# Altium PCB USB-NORA-W1.PcbDoc (part 1 of 3)
Units mm, origin at the board's own origin, x right, y up, seen from the top; angles counter-clockwise.
Board outline 61.5 x 18 mm, 4 copper layers (Top Layer, Layer 2, Layer 3, Bottom Layer), stack 2.472 mm thick; 80 components, 75 nets, 307 pads, 219 vias.
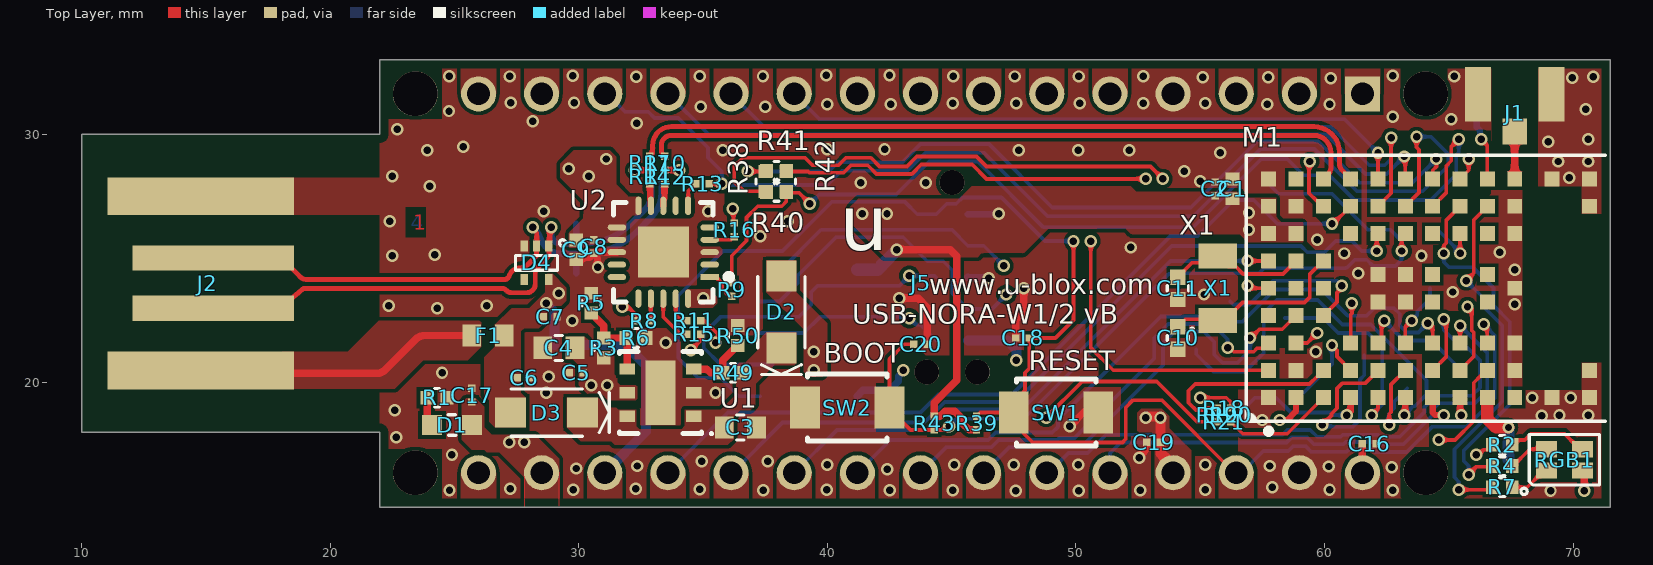
[diagram p0: Top Layer view]
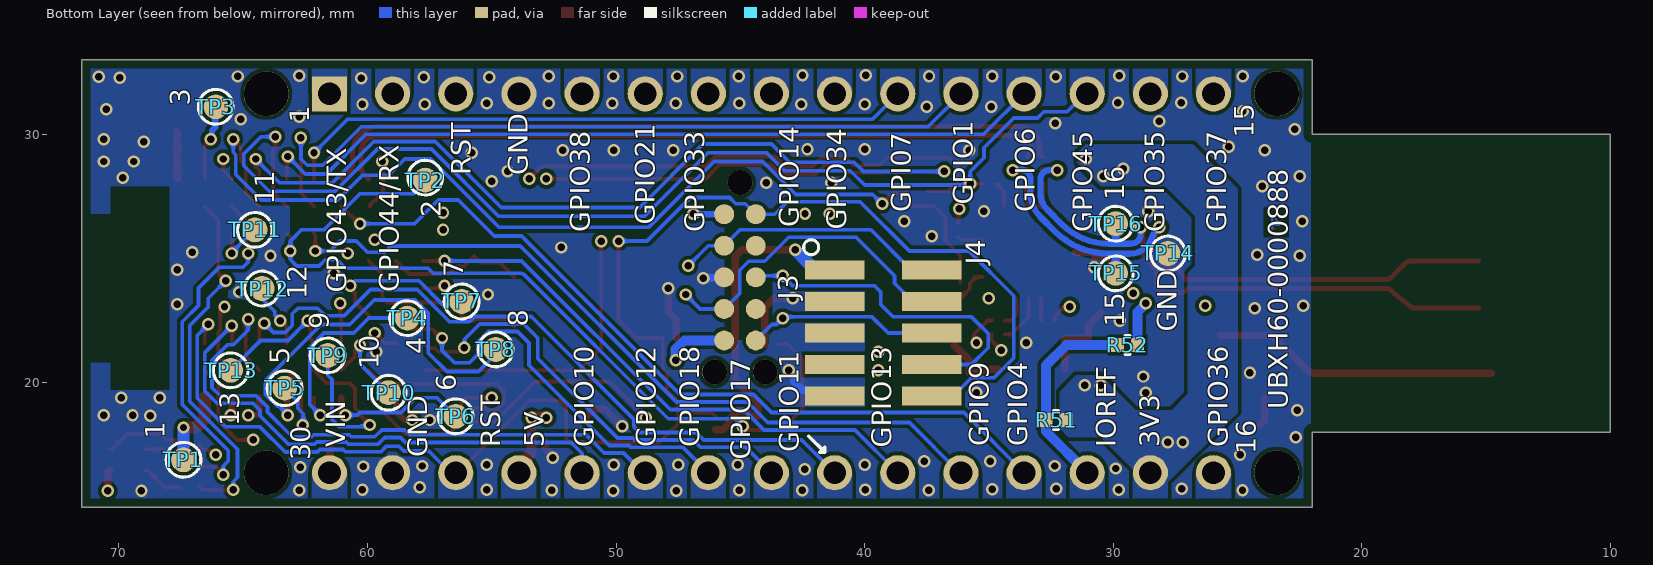
[diagram p1: Bottom Layer view, seen from below]
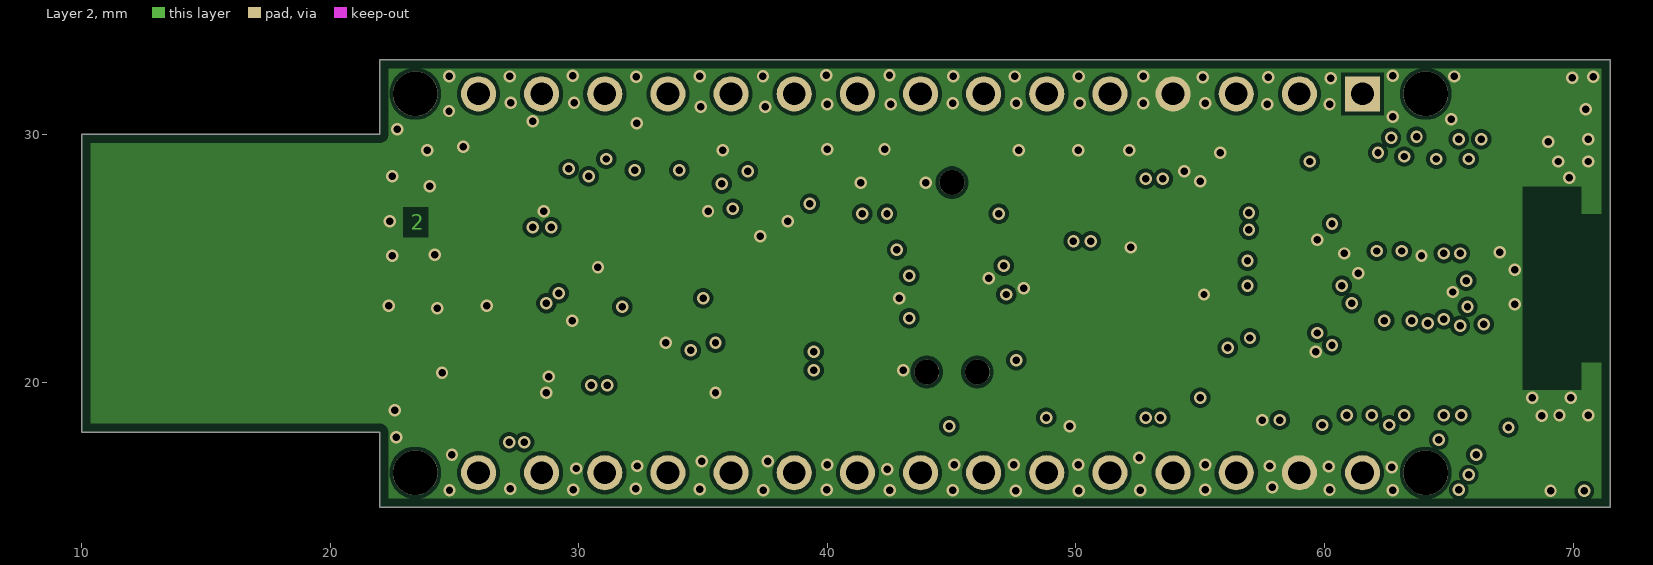
[diagram p2: Layer 2]
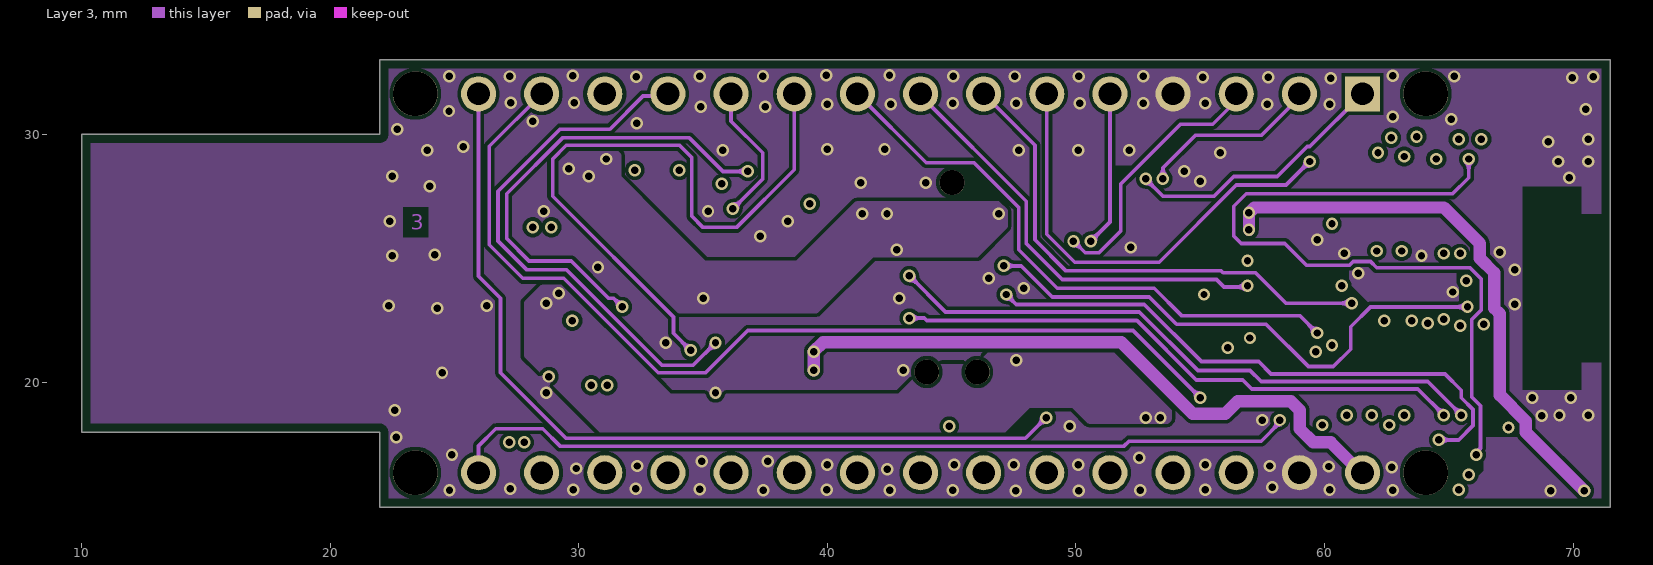
[diagram p3: Layer 3]

## Layer stack, top to bottom
Top Solder: solder mask 0.0102, Solder Resist, Dk 3.5
Top Layer: signal copper 0.035
Dielectric 2: prepreg 0.18, Prepreg 1080, Dk 3.77
Layer 2: signal copper 0.018
Dielectric10: core 2.0057, Core-039, Dk 4.8
Layer 3: signal copper 0.018
Dielectric 7: prepreg 0.18, Prepreg 1080, Dk 3.77
Bottom Layer: signal copper 0.035
Bottom Solder: solder mask 0.0102, Solder Resist, Dk 3.5

## Board outline
22,17.9 22,18 10,18 10,30 22,30 22,33 71.5,33 71.5,15 22,15

## Design rules (kind name [scope] priority, off if disabled: settings)
AssemblyTestPointUsage [All] p1 off:
AssemblyTestpoint [All] p1 off: testpointundercomponent=TRUE minsize=1.016 maxsize=2.54 preferedsize=1.524 minholesize=0 maxholesize=1.016 preferedholesize=0.813 testpointgrid=0.025 usegrid=TRUE gridtolerance=0 allowsidetop=TRUE allowsidebottom=TRUE
BoardOutlineClearance [All] p1: gap=0.356 ignorepadtopadclearanceinfootprint=FALSE
Clearance Clearance_1 [OnLayer('Top Layer')] p1: gap=0.15 ignorepadtopadclearanceinfootprint=TRUE except(0: Arc-Hole Track-Hole SMDPad-Hole THPad-Hole Via-Hole Fill-Hole Poly-Hole Region-Hole Text-Hole)
Clearance [All] p2: gap=0.15 ignorepadtopadclearanceinfootprint=FALSE except(0: Arc-Hole Track-Hole SMDPad-Hole THPad-Hole Via-Hole Fill-Hole Poly-Hole Region-Hole Text-Hole)
Clearance NoPlatedPAd [InPadClass('NPTH_Pads')] p3: gap=0.15 ignorepadtopadclearanceinfootprint=TRUE except(0.25: Fill-Hole Poly-Hole Region-Hole)
Clearance DIFF_100 [InNetClass('DIFF100')] p4: gap=0.25 ignorepadtopadclearanceinfootprint=TRUE except(0: Arc-Hole Track-Hole SMDPad-Hole THPad-Hole Via-Hole Fill-Hole Poly-Hole Region-Hole Text-Hole)
DiffPairsRouting [InDifferentialPairClass('DIFF100')] p1 off: maxlimit=1 minlimit=0.05 mostfreqgap=0.15 toplayer_mingap=0.15 toplayer_minwidth=0.3 toplayer_maxwidth=1 toplayer_prefwidth=0.3 bottomlayer_mingap=0.15 bottomlayer_minwidth=0.3 bottomlayer_maxwidth=1 bottomlayer_prefwidth=0.3 impedanceprofiledriven=TRUE impedanceprofileid={4EB0315E-D057-4056-870E-F8970DFE5718} impedanceprofilevalue=100.000000 maxuncoupledlength=12.7
FabricationTestPointUsage [All] p1 off: valid=0 allowmultiple=FALSE
FabricationTestpoint [All] p1 off: side=3 testpointundercomponent=TRUE minsize=1.016 maxsize=2.54 preferedsize=1.524 minholesize=0 maxholesize=1.016 preferedholesize=0.813 testpointgrid=0.025 allowsidetop=TRUE allowsidebottom=TRUE usegrid=TRUE gridtolerance=0
HoleSize [All] p1: absolutevalues=TRUE maxlimit=2.54 minlimit=0.2 maxpercent=80.000 minpercent=20.000
HoleToHoleClearance [All] p1: gap=0.25 allowstackedmicrovias=TRUE
MatchedLengths DiffPair_DIFF100MatchedLengths [InNetClass('DIFF100')] p1: tolerance=0.1 checknetsindiffpair=TRUE checkdiffpairvsdiffpair=FALSE checkxsignals=FALSE checkothers=FALSE usedelayunits=TRUE delaytolerance=10.000000
MinimumSolderMaskSliver MinimumSolderMaskSliver_1 [InComponent('U4')] p1: minsoldermaskwidth=0.05
MinimumSolderMaskSliver [All] p2: minsoldermaskwidth=0.1
PlaneClearance Shape_via [InNet('3V3') And GND] p2: clearance=0.25
PolygonConnect GND_ [InNet('GND') and IsVia and IsPad] p1 off: thpad.connectstyle=Relief thpad.reliefconductorwidth=0.254 thpad.reliefentries=4 thpad.polygonreliefangle="90 Angle" thpad.airgapwidth=0.254 smdpad.connectstyle=Direct smdpad.reliefconductorwidth=0.254 smdpad.reliefentries=4 smdpad.polygonreliefangle="90 Angle" smdpad.airgapwidth=0.254 via.connectstyle=Direct via.reliefconductorwidth=0.254 via.reliefentries=4 via.polygonreliefangle="90 Angle" via.airgapwidth=0.254
PolygonConnect PolygonConnect_1 [All] p2: connectstyle=Direct reliefconductorwidth=0.254 reliefentries=4 polygonreliefangle="90 Angle" airgapwidth=0.254
RoutingVias [All] p1: holewidth=0.35 width=0.7 viastyle="Through Hole" minholewidth=0.35 minwidth=0.6 maxholewidth=0.35 maxwidth=0.6 useviatemplates=TRUE viatemplateguid#1={9B9B2C8B-3407-41E5-9278-FA540D01F2C8} viatemplateguid#2={13CDBC89-8302-4A6B-AFA1-809CA17073A7} viatemplateguid#3={858E1B08-E57D-4438-9A77-3527DEC644EC} viatemplatename#1=v350h250 viatemplatename#2=v500h250 viatemplatename#3=v550h0300
SilkToSilkClearance [All] p1: silktosilkclearance=0.1
SilkToSolderMaskClearance [IsText] p1: minsilkscreentomaskgap=0.075 clearancetoexposedcopper=TRUE
SolderMaskExpansion TentedVias [isvia] p1: expansion=0.05 istentingtop=TRUE
SolderMaskExpansion [All] p2: expansion=0.05 istentingtop=FALSE
UnRoutedNet [All] p1: checkbadconnections=TRUE
UnpouredPolygon [All] p1 off:
ViasUnderSMD [All] p1: allowed=TRUE
Width Width_1 [All] p1: maxlimit=1.5 minlimit=0.15 preferedwidth=0.254 minimp=50.000000 maximp=50.000000 favimp=50.000000
Width [All] p2: maxlimit=1.5 minlimit=0.1 preferedwidth=0.15 minimp=50.000000 maximp=50.000000 favimp=50.000000
Width 50_ohm_width [InNetClass('Signals')] p3: maxlimit=1.5 minlimit=0.15 preferedwidth=0.15
18 further rules are at their usual default settings.

## Classes and differential pairs
component class U_USB-NORA-W1_SCHEM_02: C1 C2 C3 C4 C5 C6 C7 C8 C9 C10 C11 D1 D2 D3 D4 F1 J1 J2 M1 R1 R2 R3 R4 R5 R6 R7 R8 R9 R10 R11 R12 R13 R14 R15 R16 R17 R18 R19 R20 R21 R49 R50 RGB1 TP1 TP2 TP3 TP4 TP5 TP6 TP7 TP8 TP9 TP10 TP11 TP12 TP13 TP14 TP15 TP16 U1 U2 X1
component class U_USB-NORA-W1_SCHEM_03: C16 C17 C18 C19 C20 J3 J4 J5 R38 R39 R40 R41 R42 R43 R51 R52 SW1 SW2
pad class NPTH_Pads: J2-0
net class DIFF100: USB_I_N USB_I_P USB_IOD_N USB_IOD_P USB_N USB_P
differential pair USB_IOD: +USB_IOD_P -USB_IOD_N
differential pair USB_I: +USB_I_P -USB_I_N
differential pair USB: +USB_P -USB_N

## Components (designator, comment, footprint, x,y, rotation, side; value= is the part's Value field where it differs from the comment)
C1 "UBXH01-00002434U7" "Cap 0402 HD" 56.3,27.8 r90 top value=4U7
C2 "UBXH01-0000417100N" "Cap 0201 HD"#1 55.6,27.8 r90 top value=100N
C3 "UBXH01-000004010U" "Cap 0603 HD" 36.5,18.2 r0 top value=10U
C4 "UBXH01-000004010U" "Cap 0603 HD" 29.2,21.4 r180 top value=10U
C5 "UBXH01-0000245100N" "Cap 0201 HD"#1 29.9,20.4 r180 top value=100N
C6 "UBXH01-0000245100N" "Cap 0201 HD"#1 27.8,20.2 r0 top value=100N
C7 "UBXH01-0000245100N" "Cap 0201 HD"#1 28.85,22.65 r0 top value=100N
C8 "UBXH01-0000417100N" "Cap 0201 HD"#1 30.6,25.475 r270 top value=100N
C9 "UBXH01-00002434U7" "Cap 0402 HD" 29.9,25.35 r270 top value=4U7
C10 "UBXH01-000401718P" "Cap 0402" 54.1,21.8 r270 top value=18P
C11 "UBXH01-000401718P" "Cap 0402" 54.1,23.8 r270 top value=18P
C16 "UBXH01-0000417100N" "Cap 0201 HD"#2 61.8,17.55 r0 top value=100N
C17 "UBXH01-0000417100N" "Cap 0201 HD"#1 25.7,19.5 r90 top value=100N
C18 "UBXH01-0000417100N" "Cap 0201 HD"#2 47.85,21.8 r180 top value=100N
C19 "UBXH01-0000417100N" "Cap 0201 HD"#2 53.125,17.6 r180 top value=100N
C20 "UBXH01-0000417100N" "Cap 0201 HD"#2 43.75,21.55 r0 top value=100N
D1 "UBXH11-0000018" LED-0603 24.9,18.3 r0 top value=GREEN
D2 "110-00005" SOD-123F_U#1 38.15,22.85 r90 top
D3 "110-00005" SOD-123F_U#2 28.7,18.8 r180 top
D4 "110-00018" SOT-553 28.3,24.825 r270 top
F1 "UBXH08-0000001" "IND 0603 HD" 26.35,21.9 r180 top value=600OHM
J1 "UBXH04-0001026" U.FL_3Pin 67.65,31.6 r0 top value=331-0472-2
J2 "CON-4PCB" USB-A-PCB 14.995,23.884 r0 top
J3 "TC2050-IDC-NLDNP" TC2050-IDC-NL 45.65,26.78 r270 bottom locked
J4 "130-00099" HDR.050P-10Pin-2x5-SMT_Key 39.25,22 r270 bottom locked
J5 "UNK_Arduino" UNK_Arduino 42.795,24 r270 top locked
M1 "NORA-MODULE_ALT" NORA_LGA82R_1430X1040X180_ANT 63.25,23.8 r0 top locked value=NORA
R1 "UBXH18-0008046750R" "RES 0402 HD"#1 24.3,19.4 r0 top value=750R
R2 "UBXH18-0000216360R" "RES 0402 HD"#2 67.15,17.5 r180 top value=360R
R3 "UBXH18-00030020R" "RES 0402 HD"#3 31,21.4 r90 top value=0R
R4 "UBXH18-0000216360R" "RES 0402 HD"#2 67.15,16.65 r180 top value=360R
R5 "UBXH18-000807310K" "RES 0402 HD"#4 30.5,23.2 r270 top value=10K
R6 "UBXH18-000807310K" "RES 0402 HD"#3 32.3,21.8 r180 top value=10K
R7 "UBXH18-0008046750R" "RES 0402 HD"#2 67.15,15.8 r180 top value=750R
R8 "UBXH18-00000071K0" "RES 0201 HD"#1 32.625,22.5 r180 top value=1K0
R9 "UBXH18-00080491K0" "RES 0201 HD"#1 36.15,23.75 r90 top value=1K0
R10 "UBXH18-000047027R" "RES 0201 HD"#1 33.45,28.828 r90 top value=27R
R11 "UBXH18-00080491K0" "RES 0201 HD"#1 34.625,22.5 r0 top value=1K0
R12 "UBXH18-000047027R" "RES 0201 HD"#1 33.45,28.278 r270 top value=27R
R13 "UBXH18-00000071K0" "RES 0201 HD"#1 34.975,28.003 r0 top value=1K0
R14 "UBXH18-000047027R" "RES 0201 HD"#1 32.85,28.278 r270 top value=27R
R15 "UBXH18-00000071K0" "RES 0201 HD"#1 34.625,21.95 r0 top value=1K0
R16 "UBXH18-00000071K0" "RES 0201 HD"#1 36.25,26.15 r90 top value=1K0
R17 "UBXH18-000047027R" "RES 0201 HD"#1 32.85,28.828 r270 top value=27R
R18 "UBXH18-00030020R" "RES 0201 HD"#1 55.95,18.983 r0 top value=0R
R19 "UBXH18-00030020R" "RES 0201 HD"#1 55.675,18.708 r90 top value=0R
R20 "UBXH18-00030020R" "RES 0201 HD"#1 56.225,18.708 r90 top value=0R
R21 "UBXH18-00030020R" "RES 0201 HD"#1 55.95,18.433 r180 top value=0R
R38 "UBXH18-00030020R" "RES 0402 HD"#2 37.5,28.1 r90 top value=0R
R39 "UBXH18-000109710K" "RES 0201 HD"#2 46,18.375 r270 top value=10K
R40 "UBXH18-00030020R" "RES 0402 HD"#2 37.95,27.675 r180 top value=0R
R41 "UBXH18-00030020R" "RES 0402 HD"#2 37.95,28.525 r180 top value=0R
R42 "UBXH18-00030020R" "RES 0402 HD"#2 38.35,28.1 r270 top value=0R
R43 "UBXH18-000807310K" "RES 0201 HD"#2 44.3,18.375 r90 top value=10K
R49 "UBXH18-00030020R" "RES 0402 HD"#3 36.2,20.4 r180 top value=0R
R50 "UBXH18-00030020R" "RES 0402 HD"#3 36.4,21.9 r270 top value=0R
R51 "UBXH18-00030020R" "RES 0402 HD"#2 32.3,18.5 r0 bottom value=0R
R52 "UBXH18-00030020R" "RES 0402 HD"#2 29.43,21.52 r0 bottom value=0R
RGB1 "115-00026" LED_1616 69.65,16.9 r90 top
SW1 "B3U-1000P" FP-B3U-1000P-MFG 49.2,18.8 r0 top locked
SW2 "B3U-1000P" FP-B3U-1000P-MFG 40.8,19 r180 top locked
TP1 "TP" TP10R#1 67.4,16.9 r0 bottom locked
TP2 "TP" TP10R#2 57.675,28.25 r90 bottom locked
TP3 "TP" TP10R#1 66.1,31.1 r90 bottom locked
TP4 "TP" TP10R#1 58.4,22.6 r90 bottom locked
TP5 "TP" TP10R#1 63.33,19.78 r90 bottom locked
TP6 "TP" TP10R#1 56.45,18.65 r90 bottom locked
TP7 "TP" TP10R#1 56.21,23.27 r90 bottom locked
TP8 "TP" TP10R#1 54.84,21.34 r90 bottom locked
TP9 "TP" TP10R#1 61.6,21.1 r90 bottom locked
TP10 "TP" TP10R#1 59.15,19.6 r90 bottom locked
TP11 "TP" TP10R#1 64.525,26.15 r90 bottom locked
TP12 "TP" TP10R#1 64.24,23.79 r90 bottom locked
TP13 "TP" TP10R#1 65.5,20.5 r90 bottom locked
TP14 "TP" TP10R#1 27.8,25.2 r90 bottom locked
TP15 "TP" TP10R#1 29.9,24.4 r90 bottom locked
TP16 "TP" TP10R#1 29.9,26.4 r90 bottom locked
U1 "NCP692MN33T2G" DFN-PSON.1P3X3-7pin_HS-7N 33.29,19.6 r180 top value=3.3V
U2 "FT231XQ-R" QFN_5x5_FT231XQ 33.4,25.25 r180 top
X1 "100-00005" XTAL_3215 55.7,23.8 r90 top

## Footprints (in the part's own frame and the unit in brackets; to place one, negate y for a bottom-side part, rotate by r counter-clockwise, add the part's x,y. Pads: shape width x height; smd on the part's side, far side on the other; paste and mask are expansions set on the pad)
"Cap 0201 HD"#1 [mm] "Chip Capacitor, 2-Leads, Body 0.60x0.30mm, IPC High Density"
  rect 0.3x0.3 smd mask+0: 1(-0.275,0) 2(0.275,0)
  body extent -0.32,-0.17 0.32,0.17, height 0.33
"Cap 0201 HD"#2 [mm] "Chip Capacitor, 2-Leads, Body 0.60x0.30mm, IPC High Density"
  rect 0.3x0.3 smd: 1(-0.275,0)
  rect 0.3x0.3 smd mask+0: 2(0.275,0)
  body extent -0.32,-0.17 0.32,0.17, height 0.33
"Cap 0402" [mm] "Chip Capacitor, 2-Leads, Body 1.00x0.50mm, IPC Medium Density"
  rect 0.62x0.62 smd: 1(-0.45,0)
  rect 0.62x0.62 smd mask+0: 2(0.45,0)
  silkscreen extent -0.1,-0.43 0.1,0.43, body extent -0.55,-0.3 0.55,0.3, height 0.6
"Cap 0402 HD" [mm] "Chip Capacitor, 2-Leads, Body 1.00x0.50mm, IPC High Density"
  rect 0.52x0.55 smd mask+0: 1(-0.4,0) 2(0.4,0)
  body extent -0.55,-0.3 0.55,0.3, height 0.6
"Cap 0603 HD" [mm] "Chip Cap 0603, 1.75mm x 9.5mm IPC High Density"
  rect 0.75x0.9 smd mask+0: 1(-0.65,0) 2(0.65,0)
  silkscreen extent -0.15,-0.5 0.15,0.5, body extent -0.87,-0.48 0.87,0.47, height 0.95
DFN-PSON.1P3X3-7pin_HS-7N [mm] "PSON, 6-Leads, Body 3,00x3,00mm, Pitch 0,95mm, Thermal Pad 2,60x1,22mm, IPC Medium Density"
  rect 0.63x0.45 smd mask+0: 1(-1.34,0.95) 2(-1.34,0) 5(1.34,0) 6(1.34,0.95)
  rect 0.63x0.45 smd mask+0.05: 3(-1.34,-0.95) 4(1.34,-0.95)
  rect 1.22x2.6 smd mask+0: 7(0,0)
  silkscreen extent -2.1,-1.65 1.65,1.7, body extent -1.5,-1.5 1.5,1.5, height 1
FP-B3U-1000P-MFG [mm]
  rect 1.2x1.7 smd paste+0: 1(-1.7,0)
  rect 1.2x1.7 smd paste+0 mask+0: 2(1.7,0)
  silkscreen extent -1.6,-1.35 1.6,1.35, body extent -2.2,-1.45 2.2,1.45, height 0.25
HDR.050P-10Pin-2x5-SMT_Key [mm] "Header, 0.05\" Pitch, 10 Pin 2 x 5, Keyed, SMT, 6.35mm x 5.84mm"
  rect 0.76x2.4 smd: 1(-2.54,-1.95) 2(-2.54,1.95) 4(-1.27,1.95) 6(0,1.95) 7(1.27,-1.95) 8(1.27,1.95) 10(2.54,1.95)
  rect 0.76x2.4 smd mask+0: 3(-1.27,-1.95) 5(0,-1.95) 9(2.54,-1.95)
  silkscreen extent -3.75,-3.2 -3.15,-2.6, body extent -3.4,-2.9 3.4,2.9, height 5.96
"IND 0603 HD" [mm] "Chip Inductor 0603, 2-Leads, Body 1.60x0.80mm, IPC High Density"
  rect 0.75x0.9 smd mask+0: 1(-0.65,0) 2(0.65,0)
  body extent -0.85,-0.45 0.85,0.45, height 0.9
LED-0603 [mm] "led-0603"
  rect 0.8x0.8 smd: 1(-0.8,0)
  rect 0.8x0.8 smd mask+0: 2(0.8,0)
  silkscreen extent -0.15,-0.41 0.15,0.41, body extent -0.8,-0.4 0.8,0.4, height 0.6
LED_1616 [mm]
  rect 0.65x0.85 smd mask+0.05: 1(-0.425,0.725) 2(0.425,0.725) 3(0.425,-0.725) 4(-0.425,-0.725)
  silkscreen extent -1.4,-1.41 1.01,1.75, body extent -0.83,-0.83 0.83,0.83, height 0.4
NORA_LGA82R_1430X1040X180_ANT [mm] "NORA LGA, 82pin ,1.1mm Pitch, 14.3mm x 10.4mm"
  rect 0.6x0.6 smd mask+0: A1(-5.5,-4.4) A7(-5.5,2.2) A8(-5.5,3.3) A9(-5.5,4.4) B2(-4.4,-3.3) B7(-4.4,2.2) B8(-4.4,3.3) E4(-1.1,-0.55) E5(-1.1,0.55) F4(0,-0.55) F5(0,0.55) K2(4.4,-3.3) K3(4.4,-2.2) K5(4.4,0) K7(4.4,2.2) K8(4.4,3.3) L1(5.9,-4.4) L9(5.9,4.4) M1(7.4,-4.4) M2(7.4,-3.3) M8(7.4,3.3) M9(7.4,4.4)
  rect 0.6x0.6 smd: A2(-5.5,-3.3) A3(-5.5,-2.2) A4(-5.5,-1.1) A5(-5.5,0) A6(-5.5,1.1) B1(-4.4,-4.4) B3(-4.4,-2.2) B4(-4.4,-1.1) B5(-4.4,0) B6(-4.4,1.1) B9(-4.4,4.4) C1(-3.3,-4.4) C2(-3.3,-3.3) C4(-3.3,-1.1) C5(-3.3,0) C6(-3.3,1.1) C8(-3.3,3.3) C9(-3.3,4.4) D1(-2.2,-4.4) D2(-2.2,-3.3) D3(-2.2,-2.2) D7(-2.2,2.2) D8(-2.2,3.3) D9(-2.2,4.4) E1(-1.1,-4.4) E2(-1.1,-3.3) E3(-1.1,-2.2) E7(-1.1,2.2) E8(-1.1,3.3) E9(-1.1,4.4) F1(0,-4.4) F2(0,-3.3) F3(0,-2.2) F7(0,2.2) F8(0,3.3) F9(0,4.4) G1(1.1,-4.4) G2(1.1,-3.3) G3(1.1,-2.2) G4(1.1,-0.55) G5(1.1,0.55) G7(1.1,2.2) G8(1.1,3.3) G9(1.1,4.4) H1(2.2,-4.4) H2(2.2,-3.3) H3(2.2,-2.2) H7(2.2,2.2) H8(2.2,3.3) H9(2.2,4.4) J1(3.3,-4.4) J2(3.3,-3.3) J3(3.3,-2.2) J4(3.3,-0.55) J5(3.3,0.55) J7(3.3,2.2) J8(3.3,3.3) J9(3.3,4.4) K1(4.4,-4.4) K9(4.4,4.4)
  Multi-Layer pour cut-out: 7.1,-4.1 7.1,-3.001 7.9,-2.998 7.9,-5.225 8.25,-5.225 8.25,5.325 7.9,5.325 7.9,3 7.1,3 7.1,4.1 4.7,4.1 4.7,-4.1
  silkscreen extent -6.4,-5.85 8.05,5.35, body extent -6.25,-5.2 8.05,5.2, height 1.78
QFN_5x5_FT231XQ [mm]
  rect 0.74x0.242 smd paste+0 mask+0: 1(-1.866,1)
  rrect100% 0.74x0.242 smd paste+0 mask+0: 2(-1.866,0.5) 3(-1.866,0) 4(-1.866,-0.5) 5(-1.866,-1) 11(1.865,-1) 12(1.865,-0.5) 13(1.865,0) 14(1.865,0.5) 15(1.865,1)
  rrect100% 0.242x0.74 smd paste+0 mask+0: 6(-1,-1.866) 7(-0.5,-1.866) 8(0,-1.866) 9(0.5,-1.866) 10(1,-1.866) 16(1,1.865) 17(0.5,1.865) 18(0,1.865) 19(-0.5,1.865) 20(-1,1.865)
  rect 2.05x2.05 smd paste-1000 mask+0: 21(0,0)
  silkscreen extent -2.76,-2 2,2, body extent -2.34,-2.34 2.34,2.34, height 0.25
"RES 0201 HD"#1 [mm] "Resistor, 0201 High Density"
  rect 0.3x0.3 smd mask+0.05: 1(-0.275,0) 2(0.275,0)
  body extent -0.32,-0.16 0.32,0.17, height 0.25
"RES 0201 HD"#2 [mm] "Resistor, 0201 High Density"
  rect 0.3x0.3 smd mask+0.05: 1(-0.275,0)
  rect 0.3x0.3 smd mask+0: 2(0.275,0)
  body extent -0.32,-0.16 0.32,0.17, height 0.25
"RES 0402 HD"#1 [mm] "Chip Resistor, 2-Leads, Body 1.05x0.54mm, IPC High Density"
  rect 0.52x0.55 smd: 1(-0.4,0)
  rect 0.52x0.55 smd mask+0: 2(0.4,0)
  silkscreen extent -0.1,-0.37 0.1,0.38, body extent -0.55,-0.3 0.55,0.3, height 0.4
"RES 0402 HD"#2 [mm] "Chip Resistor, 2-Leads, Body 1.05x0.54mm, IPC High Density"
  rect 0.52x0.55 smd: 1(-0.4,0) 2(0.4,0)
  silkscreen extent -0.1,-0.37 0.1,0.38, body extent -0.55,-0.3 0.55,0.3, height 0.4
"RES 0402 HD"#3 [mm] "Chip Resistor, 2-Leads, Body 1.05x0.54mm, IPC High Density"
  rect 0.52x0.55 smd mask+0: 1(-0.4,0)
  rect 0.52x0.55 smd: 2(0.4,0)
  silkscreen extent -0.1,-0.37 0.1,0.37, body extent -0.55,-0.3 0.55,0.3, height 0.4
"RES 0402 HD"#4 [mm] "Chip Resistor, 2-Leads, Body 1.05x0.54mm, IPC High Density"
  rect 0.52x0.55 smd mask+0.05: 1(-0.4,0)
  rect 0.52x0.55 smd: 2(0.4,0)
  silkscreen extent -0.1,-0.38 0.1,0.37, body extent -0.55,-0.3 0.55,0.3, height 0.4
SOD-123F_U#1 [mm] "SOD-123F, Unidirectional, 2-Leads, Body 1.65x3.60mm, IPC High Density"
  rect 1.25x1.2 smd: A(1.45,0)
  rect 1.25x1.2 smd mask+0: C(-1.45,0)
  silkscreen extent -2.52,-0.95 1.43,0.95, body extent -1.45,-0.9 1.45,0.9, height 0.98
SOD-123F_U#2 [mm] "SOD-123F, Unidirectional, 2-Leads, Body 1.65x3.60mm, IPC High Density"
  rect 1.25x1.2 smd mask+0: A(1.45,0) C(-1.45,0)
  silkscreen extent -2.52,-0.95 1.43,0.95, body extent -1.45,-0.9 1.45,0.9, height 0.98
SOT-553 [mm] "SOT-553, 5 lead 0.50mm pitch, 1.3mm x 1.7mm"
  rect 0.45x0.3 smd mask+0.05: 1(-0.675,0.5) 2(-0.675,0)
  rect 0.45x0.3 smd mask+0: 3(-0.675,-0.5) 4(0.675,-0.5) 5(0.675,0.5)
  silkscreen extent -0.92,-0.85 0.3,1.18, body extent -0.68,-0.85 0.67,0.85, height 0.6
TC2050-IDC-NL [mm] "CON PADS FOR CBL PLUG-OF-NAILS 10-PIN NO LEGS"
  round 0.8 smd paste-0.9: 1(0,0) 2(1.27,0) 3(2.54,0) 4(3.81,0) 5(5.08,0) 6(5.08,1.27) 7(3.81,1.27) 8(2.54,1.27) 9(1.27,1.27) 10(0,1.27)
  round 1 hole 1 paste-1.1: A(-1.27,0.635) B(6.35,-0.381) C(6.35,1.651)
  Top Layer pour cut-out: 0,1.27 5.08,1.27 5.08,0 0,0
TP10R#1 [mm] "Testpoint, Round 1.0mm Dia"
  round 1 smd paste-0.5: 1(0,0)
  silkscreen extent -0.7,-0.7 0.7,0.7, body extent -0.5,-0.5 0.5,0.5, height 0.05
TP10R#2 [mm] "Testpoint, Round 1.0mm Dia"
  round 1 smd paste-0.5: 1(-0.1,0)
  silkscreen extent -0.7,-0.7 0.7,0.7, body extent -0.5,-0.5 0.5,0.5, height 0.05
U.FL_3Pin [mm] "U.FL Coax Jack, 50 ohm, 3 Pins, 3mm x 3.1mm"
  rect 1x1.05 smd: 1(0,-1.5)
  rect 1.05x2.2 smd mask+0: 2(-1.475,0) 2(1.475,0)
  body extent -1.5,-1.55 1.5,1.55, height 1.24
UNK_Arduino [mil]
  rect 55.67x55.67 hole 35.98 paste-39370.1 mask+0: 1(-300,737.5)
  round 55.67 hole 35.98 paste-39370.1 mask+0: 2(-300,637.5) 3(-300,537.5) 4(-300,437.5) 5(-300,337.5) 6(-300,237.5) 7(-300,137.5) 8(-300,37.5) 9(-300,-62.5) 10(-300,-162.5) 11(-300,-262.5) 12(-300,-362.5) 13(-300,-462.5) 14(-300,-562.5) 15(-300,-662.5) 16(300,-662.5) 17(300,-562.5) 18(300,-462.5) 19(300,-362.5) 20(300,-262.5) 21(300,-162.5) 22(300,-62.5) 23(300,37.5) 24(300,137.5) 25(300,237.5) 26(300,337.5) 27(300,437.5) 28(300,537.5) 29(300,637.5) 30(300,737.5)
USB-A-PCB [mil]
  rect 296x60 smd paste-196.85 mask+1.97: 1(-7.87,-133.33) 4(-7.87,142.46)
  rect 256x40 smd paste-196.85 mask+1.97: 2(12,-34.9) 3(12,44.47)
XTAL_3215 [mm] "XTAL, 2-Leads, Body 1.50x3.20mm"
  rect 1x1.55 smd: 1(-1.3,0) 2(1.3,0)
  silkscreen extent -1.7,0.97 -1.6,1.07, body extent -1.65,-0.8 1.65,0.8, height 0.9

## Part data
C1 C9: library part UBXH01-0000243, "CAP CER X5R 0402", Manufacturer="Murata Manufacturing Company, Ltd.", Manufacturer P/N=GRM155R61A475MEAA, Max Operating Temp=85°C, Max Voltage=10.0V, Min Operating Temp=-40°C, Tolerance=20%, Editor=dario.antonaz, Env=ROHS, Mfg P/N Datasheet=https://wiki.u-blox.com/bin/view/Generic/Docs/DocumentSummary?index=24302, Mfg P/N Released=Yes, Mfg P/N Split=100, Mfg P/N Status=Active, Part Number=UBXH01-0000243, Part Type=Capacitor, Perferred=PREF, Permitted Use="Volume Products", RefDes=C, Release Data="2016-03-17 10:02:21.014314", Released by=pasquale.scorca, Size=0x0y, UBX Wiki=https://wiki.u-blox.com/bin/view/Operations/PartDetails?index=24303
C2 C5 C6 C7 C8 C16 C17 C18 C19 C20: library part UBXH01-0000245, "CAP CER X5R 0201 100N 10% 10V", Manufacturer="Murata Manufacturing Company, Ltd.", Manufacturer 2="Taiyo Yuden Company, Ltd.", Manufacturer 3="Samsung Electro-Mechanics", Manufacturer P/N=GRM033R61A104KE84, Manufacturer P/N 2=LMK063BJ104KP-F, Manufacturer P/N 3=CL03A104KA3NNN, Max Operating Temp=85°C, Max Voltage=10V, Min Operating Temp=-40°C, Tolerance=10%, Editor=dario.antonaz, Env=ROHS, Mfg P/N Datasheet=https://wiki.u-blox.com/bin/view/Generic/Docs/DocumentSummary?index=24348, Mfg P/N Datasheet 2=https://wiki.u-blox.com/bin/view/Generic/Docs/DocumentSummary?index=27440, Mfg P/N Datasheet 3=https://wiki.u-blox.com/bin/view/Generic/Docs/DocumentSummary?index=28183, Mfg P/N Released=Yes, Mfg P/N Released 2=Yes, Mfg P/N Released 3=Yes, Mfg P/N Split=0, Mfg P/N Split 2=0, Mfg P/N Split 3=0, Mfg P/N Status=Active, Mfg P/N Status 2=Active, Mfg P/N Status 3=Active, Part Number=UBXH01-0000245, Part Type=Capacitor, Perferred=PREF, Permitted Use="Volume Products", RefDes=C, Release Data="2016-03-11 16:09:03.879257", Released by=jure.podmenik, Size=0201, UBX Wiki=https://wiki.u-blox.com/bin/view/Operations/PartDetails?index=24347
C3 C4: library part UBXH01-0000040, "CAP CER X5R 0603 10U 20% 10V", Manufacturer="Taiyo Yuden Company, Ltd.", Manufacturer 2="Murata Manufacturing Company, Ltd.", Manufacturer P/N=LMK107BBJ106MALT, Manufacturer P/N 2=GRM188R61A106KAAL, Manufacturer P/N 3=LMK107BJ106MALTD, Max Voltage=10V, Tolerance=20%, Editor=pierpaolo.arban, Env=ROHS, Manufacturer 3="Taiyo Yuden Company, Ltd.", Mfg P/N Datasheet=https://wiki.u-blox.com/bin/view/Generic/Docs/DocumentSummary?index=16905, Mfg P/N Datasheet 2=https://wiki.u-blox.com/bin/view/Generic/Docs/DocumentSummary?index=27232, Mfg P/N Datasheet 3=https://wiki.u-blox.com/bin/view/Generic/Docs/DocumentSummary?index=29392, Mfg P/N Released=Yes, Mfg P/N Released 2=Yes, Mfg P/N Released 3=Yes, Mfg P/N Split=100, Mfg P/N Split 2=0, Mfg P/N Split 3=0, Mfg P/N Status=Active, Mfg P/N Status 2=Active, Mfg P/N Status 3=NRND, Part Number=UBXH01-0000040, Part Type=Capacitor, Perferred=PREF, Permitted Use="Volume Products", RefDes=C, Release Data="2013-01-10 11:54:39.678233", Released by=matej.budin, Size=0603, UBX Wiki=https://wiki.u-blox.com/bin/view/Operations/PartDetails?index=16909
C10 C11: library part UBXH01-0004017, "CAP CER C0G 0402 18P 5% 25V", Manufacturer="Murata Manufacturing Company, Ltd.", Manufacturer P/N=GRM1555C1H180JA01, Manufacturer P/N 2=GRM1555C1E180JZ01, Manufacturer P/N 3=GRM1555C1H180JZ01, Max Operating Temp=125°C, Max Voltage=25V, Min Operating Temp=-55°C, Tolerance=5%, Editor=doris.zahnd, Env=ROHS, Manufacturer 2="Murata Manufacturing Company, Ltd.", Manufacturer 3="Murata Manufacturing Company, Ltd.", Mfg P/N Released=Yes, Mfg P/N Released 2=Yes, Mfg P/N Released 3=Yes, Mfg P/N Split=100, Mfg P/N Split 2=0, Mfg P/N Split 3=0, Mfg P/N Status=NRND, Mfg P/N Status 2=Obsolete, Mfg P/N Status 3=Obsolete, Part Number=UBXH01-0004017, Part Type=Capacitor, Perferred=PREF, Permitted Use="Volume Products", RefDes=C, Release Data="2009-12-03 17:48:42.813059", Released by=daniel.hurni, Size=0402, UBX Wiki=https://wiki.u-blox.com/bin/view/Operations/PartDetails?index=5178
D1: "LED CHIP 0603 LOW CURRENT OSRAM 0.002A", Manufacturer=Osram, Manufacturer P/N="LG L29K-G2J1-24", Max Current=2mA, Max Operating Temp=85°C, Max Voltage=2.2V, Min Operating Temp=-40°C, Editor=johann.furrer, Env=ROHS, Mfg P/N Datasheet=https://wiki.u-blox.com/bin/view/Generic/Docs/DocumentSummary?index=20620, Mfg P/N Released=Yes, Mfg P/N Split=100, Mfg P/N Status=Active, Part Number=UBXH11-0000018, Part Type=LED, Perferred=PREF, Permitted Use="Volume Products", RefDes=DS, Release Data="2018-01-09 15:31:38.754561", Released by=martin.grasse, UBX Wiki=https://wiki.u-blox.com/bin/view/Operations/PartDetails?index=20619
D2 D3: "Diode, Schottky, 20V 1A SOD-123F, 340mV Vf @ 1A / MBR120VLSFT3G", Current=1A, Manufacturer 1="ON Semiconductor", Manufacturer 2=None, Manufacturer Part Number 1=MBR120VLSFT3G, Max Operating Temp=125, MFG Package=SOD-123FL, Min Operating Temp=-65, Part Name="Diode Schottky 20V 1A SOD-123FL", Supplier Part Number 1=MBR120VLSFT3GOSCT-ND, Voltage=20V, Body Size=None, Height=0.98mm, Item Phase="In Production", Manufacturer Part Number 2=None, Part Number=110-00005, Pins=2, Revision=0B, Supplier 1=Digi-Key, Supplier 2=None, Supplier Part Number 2=None, UBX Code=None, Use in new designs=Yes
D4: "LOW-CAPACITANCE 3-CHANNEL ESD-PROTECTION ARRAY", Manufacturer="Texas Instruments", Manufacturer P/N=TPD3E001DRLR, MFG Package=SOT-553, Package Type=SOT, Part Name="TVS Diode, 3CH High Speed ESD", Supplier Part Number 1=296-21885-1-ND, Voltage=5V, Arena Link=https://app.bom.com/a/UCV39GZGZIHX50AE?v=spec.summary, Body Size="1.6mm x 1.2mm", Component Mounting Type=SMT, Diode Type=TVS, Height=.55mm, Item_Phase=Production, Part Number=110-00018, Part_Type=Diode, Pins=5, Revision=0A, Supplier 1=Digi-Key, Use in new designs=Yes
F1: "FERRITE BEAD, 0603, 600 OHM AT 100MHZ", Manufacturer="TDK Corporation", Manufacturer P/N=MMZ1608B601C, Max Current=500mA, Max Operating Temp=125°C, Min Operating Temp=-40°C, Editor=daniel.hurni, Env=ROHS, Mfg P/N Datasheet=https://wiki.u-blox.com/bin/view/Generic/Docs/DocumentSummary?index=7941, Mfg P/N Released=Yes, Mfg P/N Split=100, Mfg P/N Status=Active, Part Number=UBXH08-0000001, Part Type=Ferrite, Perferred=PREF, Permitted Use="Support Products", RefDes=FB, Release Data="2009-12-02 10:18:36.177919", Released by=martin.frauchiger, Size=0x0y, UBX Wiki=https://wiki.u-blox.com/bin/view/Operations/PartDetails?index=7960
J1: "CONN HIROSE U.FL SERIES STRAIGHT RECEPTACLE", Manufacturer=Hirose, Manufacturer P/N=331-0472-2, Editor=roland.rust, Env=ROHS, Mfg P/N Released=Yes, Mfg P/N Split=0, Mfg P/N Status=Obsolete, Part Number=UBXH04-0001026, Part Type=Connector, Perferred=PREF, Permitted Use="Support Products", RefDes=J, Release Data="2007-09-18 11:03:31", Released by=roland.rust, UBX Wiki=https://wiki.u-blox.com/bin/view/Operations/PartDetails?index=5854
J2: library part UBXH04-0000711, "CONN USB PLUG A TYPE PCB FOOTPRINT", Editor=aneeb.sohail, Env=ROHS, Part Number=UBXH04-0000711, Part Type=Connector, Perferred=N/A, Permitted Use="Support Products", RefDes=J, UBX Wiki=https://wiki.u-blox.com/bin/view/Operations/PartDetails?index=35472
J3: library part TC2050-IDC-NL, "CON PADS FOR CBL PLUG-OF-NAILS 10-PIN NO LEGS", Manufacturer="TAG Connect", Added By="Paul B", Added Date=12/3/2015, DNP=DNP, Height=0, Manufacturer P/N=TC2050-IDC-NL, Part Number=TC2050-IDC-NL, Size="6.1mm x 9.9mm"
J4: "Header 0.05\" 10Pin 2Row SMD Black", Color=Black, Manufacturer=Samtec, Manufacturer P/N=FTSH-105-01-F-DV-K, Part Name="CON HDR 0.05\" 10Pin 2Row SMD Black", Supplier Part Number 1=SAM8796-ND, Arena Link=https://app.bom.com/a/5N6EKRARATS7TSHL?v=spec.summary, Component Mounting Type=SMT, Connector Type=Header, Height=6mm, Item_Phase=Pre-Production, Keyed=Yes, Length=12.75mm, Locking=No, Part Number=130-00099, Part_Type=Connector, Pin Pitch="0.050\"", Pins=10, Revision=1, Rows=2, Supplier 1=Digi-Key, Use in new designs=Yes, Width=4.78
J5: library part UBXH04-0000717, "ARDUINO NANO 33 IOT CONN", Max Operating Temp=85°C, Min Operating Temp=-40°C, Editor=aneeb.sohail, Env=ROHS, Part Number=UBXH04-0000717, Part Type=Connector, Perferred=PREF, Permitted Use="Support Products", RefDes=J, UBX Wiki=https://wiki.u-blox.com/bin/view/Operations/PartDetails?index=35490
M1: "u-blox NORA module generic symbol for use within module designs - alternate version", Manufacturer=u-blox, Manufacturer P/N=NORA, Body Size="14.3 mm x 10.4 mm", Height=0, Part Description="NORA MODULE FOOTPRINT", Part Name=NORA, Part Number=NORA, Part_Type=Module
R1 R7: library part UBXH18-0008046, "RES THICK FILM CHIP 0402", Manufacturer=Panasonic, Manufacturer P/N=ERJ2GEJ751X, Max Power=100mW, Tolerance=5%, Editor=jaka.bevk, Env=ROHS, Mfg P/N Datasheet=https://wiki.u-blox.com/bin/view/Generic/Docs/DocumentSummary?index=21267, Mfg P/N Released=Yes, Mfg P/N Split=100, Mfg P/N Status=Active, Part Number=UBXH18-0008046, Part Type=Resistor, Perferred=PREF, Permitted Use="Volume Products", RefDes=R, Release Data="2014-10-03 09:31:33.687559", Released by=erian.bezhani, Size=0x0y, UBX Wiki=https://wiki.u-blox.com/bin/view/Operations/PartDetails?index=6935
R2 R4: library part UBXH18-0000216, "RES THICK FILM CHIP 0402", Manufacturer=KOA, Manufacturer P/N=RK73H1ETTP3600F, Max Power=63mW, Tolerance=1%, Automotive=Yes, Editor=michael.hein, Env=ROHS, Mfg P/N Datasheet=https://wiki.u-blox.com/bin/view/Generic/Docs/DocumentSummary?index=8222, Mfg P/N Released=Yes, Mfg P/N Split=100, Mfg P/N Status=Active, Part Number=UBXH18-0000216, Part Type=Resistor, Perferred=PREF, Permitted Use="Volume Products", RefDes=R, Release Data="2015-10-02 11:55:45.476057", Released by=vasyl.dykyy, Size=0x0y, UBX Wiki=https://wiki.u-blox.com/bin/view/Operations/PartDetails?index=23306
R3 R38 R40 R41 R42 R49 R50 R51 R52: library part UBXH18-0003002, "RES THICK FILM CHIP 0402", Manufacturer=YAGEO, Manufacturer P/N=2322_705_91001_L, Max Power=100mW, Tolerance=0, Editor=charlotte.biber, Env=ROHS, Mfg P/N Released=Yes, Mfg P/N Split=0, Mfg P/N Status=NRND, Part Number=UBXH18-0003002, Part Type=Resistor, Perferred=PREF, Permitted Use="Volume Products", RefDes=R, Release Data="2012-06-05 09:49:55.978616", Released by=peter.mueller, Size=0x0y, UBX Wiki=https://wiki.u-blox.com/bin/view/Operations/PartDetails?index=6611
R5 R6: library part UBXH18-0008073, "RES THICK FILM CHIP 0402 10K 5% 100mW", Manufacturer=YAGEO, Manufacturer P/N=2322_705_87103_L, Max Power=100mW, Tolerance=5%, Editor=martin.frauchiger, Env=ROHS, Mfg P/N Released=Yes, Mfg P/N Split=0, Mfg P/N Status=NRND, Part Number=UBXH18-0008073, Part Type=Resistor, Perferred=PREF, Permitted Use="Volume Products", RefDes=R, Release Data="2005-08-19 10:42:45", Released by=martin.frauchiger, Size=0402, UBX Wiki=https://wiki.u-blox.com/bin/view/Operations/PartDetails?index=6981
R8 R9 R11 R13 R15 R16: library part UBXH18-0000007, "RES THICK FILM CHIP 0201 1K0 5% 50mW", Manufacturer=KOA, Manufacturer 2=Panasonic, Manufacturer 3=YAGEO, Manufacturer P/N=RK73B1HTTC102J, Manufacturer P/N 2=ERJ-1GNJ102C, Manufacturer P/N 3=RC0201JR-071KL, Max Power=50mW, Tolerance=5%, Editor=martin.pilik, Env=GREEN, Mfg P/N Datasheet=https://wiki.u-blox.com/bin/view/Generic/Docs/DocumentSummary?index=4543, Mfg P/N Datasheet 2=https://wiki.u-blox.com/bin/view/Generic/Docs/DocumentSummary?index=35141, Mfg P/N Datasheet 3=https://wiki.u-blox.com/bin/view/Generic/Docs/DocumentSummary?index=26941, Mfg P/N Released=Yes, Mfg P/N Released 2=No, Mfg P/N Released 3=Yes, Mfg P/N Split=100, Mfg P/N Split 2=0, Mfg P/N Split 3=0, Mfg P/N Status=Active, Mfg P/N Status 2=Active, Mfg P/N Status 3=Active, Part Number=UBXH18-0000007, Part Type=Resistor, Perferred=PREF, Permitted Use="Volume Products", RefDes=R, Release Data="2021-05-10 13:01:52.556503", Released by=fabrice.bret-dibat, Size=0201, UBX Wiki=https://wiki.u-blox.com/bin/view/Operations/PartDetails?index=8216
R10 R12 R14 R17: library part UBXH18-0000470, "RES THICK FILM CHIP 0201 27R 5% 50mW", Manufacturer="Samsung Electro-Mechanics", Manufacturer 2=YAGEO, Manufacturer P/N=RC0603J270CS, Manufacturer P/N 2=RC0201JR-0727RL, Max Operating Temp=125°C, Max Power=50mW, Min Operating Temp=-55°C, Tolerance=5%, Editor=alex.claville, Env=ROHS, Mfg P/N Released=Yes, Mfg P/N Released 2=Yes, Mfg P/N Split=100, Mfg P/N Split 2=0, Mfg P/N Status=NRND, Mfg P/N Status 2=Active, Part Number=UBXH18-0000470, Part Type=Resistor, Perferred=N/A, Permitted Use="Volume Products", RefDes=R, Release Data="2019-05-22 14:26:44.225770", Released by=andre.pick, Size=0201, UBX Wiki=https://wiki.u-blox.com/bin/view/Operations/PartDetails?index=30167
R18 R19 R20 R21: library part UBXH18-0003003, "RES THICK FILM CHIP 0201 0R 0 500mA", Manufacturer=KOA, Manufacturer 2="Samsung Electro-Mechanics", Manufacturer P/N=RK73Z1HTTC, Manufacturer P/N 2=RC0603J000CS, Max Current=500mA, Tolerance=0, Editor=martin.pilik, Env=GREEN, Mfg P/N Datasheet=https://wiki.u-blox.com/bin/view/Generic/Docs/DocumentSummary?index=8616, Mfg P/N Datasheet 2=https://wiki.u-blox.com/bin/view/Generic/Docs/DocumentSummary?index=20205, Mfg P/N Released=Yes, Mfg P/N Released 2=Yes, Mfg P/N Split=100, Mfg P/N Split 2=0, Mfg P/N Status=Active, Mfg P/N Status 2=NRND, Part Number=UBXH18-0003003, Part Type=Resistor, Perferred=PREF, Permitted Use="Volume Products", RefDes=R, Release Data="2021-06-24 13:59:00.147333", Released by=fabrice.bret-dibat, Size=0201, UBX Wiki=https://wiki.u-blox.com/bin/view/Operations/PartDetails?index=6614
R39 R43: library part UBXH18-0001097, "RES THICK FILM CHIP 0201 10K 5% 50mW", Manufacturer=KOA, Manufacturer 2=Panasonic, Manufacturer 3=YAGEO, Manufacturer P/N=RK73B1HTTC103J, Manufacturer P/N 2=ERJ-1GNJ103C, Manufacturer P/N 3=RC0201JR-0710KL, Max Power=50mW, Tolerance=5%, Editor=martin.pilik, Env=GREEN, Mfg P/N Datasheet=https://wiki.u-blox.com/bin/view/Generic/Docs/DocumentSummary?index=4543, Mfg P/N Datasheet 2=https://wiki.u-blox.com/bin/view/Generic/Docs/DocumentSummary?index=35141, Mfg P/N Datasheet 3=https://wiki.u-blox.com/bin/view/Generic/Docs/DocumentSummary?index=26941, Mfg P/N Released=Yes, Mfg P/N Released 2=No, Mfg P/N Released 3=Yes, Mfg P/N Split=100, Mfg P/N Split 2=0, Mfg P/N Split 3=0, Mfg P/N Status=Active, Mfg P/N Status 2=Active, Mfg P/N Status 3=Active, Part Number=UBXH18-0001097, Part Type=Resistor, Perferred=PREF, Permitted Use="Volume Products", RefDes=R, Release Data="2021-05-21 12:17:49.148436", Released by=fabrice.bret-dibat, Size=0201, UBX Wiki=https://wiki.u-blox.com/bin/view/Operations/PartDetails?index=6581
RGB1: "LED RGB SMT 0606", Current=20mA, Manufacturer 1="Lite-On Inc", Manufacturer Part Number 1=LTST-C19HE1WT, Max Operating Temp=80, MFG Package=0606, Min Operating Temp=-20, Supplier Part Number 1=160-2162-1-ND, Voltage=None, Body Size="1.6mm x 1.6mm", Height=0.35mm, Item Phase="In Production", Part Name="LED RGB SMT 0606", Part Number=115-00026, Pins=4, Revision=0B, Size=Other, Supplier 1=Digi-Key, Supplier 2=Digi-Key, Supplier Part Number 2=1516-1184-1-ND, UBX Code=None, Use in new designs=Yes
SW1 SW2: library part CMP-2100-03586-2, "SWITCH TACTILE SPST-NO 0.05A 12V", Contact Current Rating=50mA, Contact Resistance=100mR, Insulation Resistance=100MR, Max Operating Temperature=70°C, Max Voltage Rating (DC)=12V, Min Operating Temperature=-25°C, Operating Force=1.5N, Package Quantity=1, Ratings="Dust Proof", Actuator Length=0.4mm, Actuator Type=Standard, Contact Material=Silver, Current Rating=50mA, Depth=2.5mm, Electrical Life=200000Cycles, Height=1.2mm, Illumination Type=Non-Illuminated, Lead Free="Lead Free", Length=4mm, Max Current Rating=50mA, Mechanical Life=200000Cycles, Mount="Surface Mount", Orientation=Straight, Packaging="Tape and Reel", Switch Function=Off-Mom, Switch Travel=0.15mm, Termination=SMD/SMT, Throw Configuration=SPST, Voltage Rating (DC)=12V, Weight=0.000776oz, Width=3mm
TP1 TP2 TP3 TP4 TP5 TP6 TP7 TP8 TP9 TP10 TP11 TP12 TP13 TP14 TP15 TP16: library part TP10R, "Testpoint, Round 1.0mm Dia", Added By="Jeremy D", Added Date=2/1/2015, Checked By="Paul B", Checked Date=2/5/2015, DNP=DNP, Height=0, Part Number=TP10R, Size=1.0mm
U1: library part UBXH12-0000459, "LOW DROPOUT REGULATOR ON SEMICONDUCTOR NCP692MN33T2G 6DFN 3.3V 6V 1A", Manufacturer="ON Semiconductor", Max Current=1A, Max Operating Temp=125°C, Max Voltage=6V, Min Operating Temp=-40°C, Editor=hakan.ekfors, Env=ROHS, Manufacturer P/N=NCP692MN33T2G, Mfg P/N Datasheet=https://wiki.u-blox.com/bin/view/Generic/Docs/DocumentSummary?index=35425, Mfg P/N Released=Yes, Mfg P/N Split=100, Mfg P/N Status=Active, Part Number=UBXH12-0000459, Part Type=Regulator, Perferred=PREF, Permitted Use="Volume Products", RefDes=U, Release Data="2021-08-23 15:14:48.502500", Released by=markus.wejrot, UBX Wiki=https://wiki.u-blox.com/bin/view/Operations/PartDetails?index=35423
U2: library part UBXH10-0000054, "FTDI USB TO SERIAL FULL UART INTERFACE QFN20", Manufacturer="FTDI Future Technology Devices International", Max Operating Temp=85°C, Min Operating Temp=-40°C, Editor=adam.johansson, Env=ROHS, Manufacturer P/N=FT231XQ-R, Mfg P/N Datasheet=https://wiki.u-blox.com/bin/view/Generic/Docs/DocumentSummary?index=33707, Mfg P/N Released=No, Mfg P/N Split=100, Mfg P/N Status=Active, Part Number=UBXH10-0000054, Part Type=Interface, Perferred=PREF, Permitted Use="Support Products", RefDes=U, UBX Wiki=https://wiki.u-blox.com/bin/view/Operations/PartDetails?index=27258
X1: "XTAL, 2Pin, 32.768kHz, 7pF 20ppm", Frequency=32.768kHz, Frequency Tolerance=20ppm, Manufacturer=Epson, Manufacturer 2="AVX Corporation", Manufacturer P/N="FC-135 32.7680KA-AG3", Manufacturer P/N 2=ST3215SB32768C0HPWBB, MFG Package=2-SMD, Part Name="XTAL 32.768kHz 7pF 20ppm 3215", Supplier Part Number 1=SER4086CT-ND, Arena Link=https://app.bom.com/a/L3MU07Q7Q98O5PC8?v=spec.summary, Body Size="3.2mm x 1.5mm", CL=7pF, Component Mounting Type=SMT, Height=0.9mm, Item_Phase=Production, Part Number=100-00005, Part_Type=Crystal/Oscillator, Pins=2, Revision=0C, Supplier 1=Digi-Key, Supplier 2=Digi-Key, Supplier Part Number 2=1253-1113-1-ND, Use in new designs=Yes

## Free pads (board coordinates)
  round 1.8 hole 1.8 unplated: MTH1(23.427,31.62) MTH2(23.427,16.38) MTH3(64.068,16.38) MTH4(64.068,31.62)

## Via types
v1: diameter 0.5/0.5/0.5/0.5 (per signal layer), hole 0.3, Top Layer to Bottom Layer, tented both sides, 219 vias

## Nets (pads, with @x,y where several pads share a name; then routed paths per layer and width w, separated by ;. In a path a pad name is that pad's centre, name@x,y a point inside that pad or via, vN(x,y) a via of type N, cw(c..) or ccw(c..) an arc to the next point about the centre after c; other vN are vias at no path point)
3V3: C1.1 C2.1 C4.1 C5.1 C8.1 C9.1 C17.1 D1.2 J3.1 J4.1 J5.17 M1.A7 M1.A8 M1.B7 R3.1 R39.2 R43.2 R51.1 RGB1.4 U1.5 U2.10 U2.11 U2.12 U2.20 | length 37.9
  Top Layer w0.3: v1(42.8,25.35) 44.936,25.35 45.2,25.086 45.2,20.1 44.3,19.2 R43.2@44.3,18.65 44.522,18.65 44.672,18.8 44.7,18.8 44.75,18.85 45.128,18.85 45.45,18.528 45.45,18.35 45.7,18.1 R39.2@46,18.1 ; RGB1.4@70.375,16.475 70.45,16.4 v1(70.45,15.65)
  Layer 3 w0.5: v1(56.96,26.15) v1(56.96,26.83) 57.18,27.05 64.8,27.05 66.25,25.6 66.25,25 66.825,24.425 66.825,22.997 67.05,22.772 67.05,19.5 68.09,18.46 68.09,18.01 v1(70.45,15.65)
  Bottom Layer w0.25: J3.1@45.65,26.78 46.88,26.78 v1(46.9,26.8)
  Bottom Layer w0.5: J4.1@41.2,24.54 42.02,24.54 42.19,24.71 42.19,24.74 v1(42.8,25.35)
  other v1: 27.2,17.6 27.8,17.6 30.5,19.9 31.15,19.9 35,23.4 41.4,26.8 42.4,26.8 30.4,28.3 29.6,28.6 31.1,29
GND: C1.2 C2.2 C3.2 C4.2 C5.2 C6.2 C7.2 C8.2 C9.2 C10.2 C11.2 C16.2 C17.2 C18.2 C19.2 C20.2 D4.3 J1.2 J2.4 J3.3 J4.3 J4.5 J4.9 J5.4 J5.29 M1.A1 M1.A9 M1.B2 M1.B8 M1.E4 M1.E5 M1.F4 M1.F5 M1.K2 M1.K3 M1.K5 M1.K7 M1.K8 M1.L1 M1.L9 M1.M1 M1.M2 M1.M8 M1.M9 R1.2 R5.1 R6.1 R50.1 SW1.2 SW2.2 TP14.1 U1.2 U1.7 U2.3 U2.13 U2.21 | length 13
  Top Layer w0.254: C8.2@30.6,25.2 30.753,25.047 30.753,24.747 v1@30.8,24.7
  Top Layer w0.3: C9.2@29.9,24.95 30.01,25.06 30.46,25.06 C8.2@30.6,25.2 30.65,25.25 U2.13@31.535,25.25 ; v1@30.76,24.647 v1@30.765,24.647 ; v1(42.9,23.4) 43.65,23.4 44.025,23.025 C20.2@44.025,21.55 ; C18.2@47.575,21.8 47.575,22.525 47.9,22.85 v1(47.9,23.8) ; v1(49.75,18.25) 50.425,18.925 50.925,18.925 SW1.2@51.15,18.7 ; v1(52.54,16.99) 52.54,17.044 52.85,17.354 C19.2@52.85,17.6
  Bottom Layer w0.3: J4.9@41.2,19.46 41.43,19.69 42.49,19.69 42.862,20.062 42.862,20.258 43.05,20.446 v1(43.05,20.5) ; J3.3@45.65,24.24 45.67,24.22 46.48,24.22 v1(46.5,24.2)
  other v1: 47.57,15.66 50.12,15.66 69.09,15.66 24.8,15.68 37.42,15.67 42.51,15.67 45.04,15.67 52.59,15.68 62.75,15.67 29.78,15.7 34.87,15.71 39.97,15.69 55.2,15.7 60.2,15.7 27.25,15.73 32.3,15.74 57.9,15.8 42.414,16.514 29.9,16.55 62.7,16.6 32.35,16.65 57.8,16.65 60.17,16.63 40,16.7 45.1,16.7 47.5,16.7 50.1,16.7 55.2,16.7 34.95,16.85 37.6,16.85 24.9,17.1 22.65,17.8 57.5,18.5 68.74,18.67 69.45,18.7 70.6,18.7 22.6,18.9 68.35,19.4 69.9,19.4 28.7,19.6 35.5,19.6 28.8,20.25 24.5,20.4 59.65,21.25 33.5,21.6 29.74,22.5 24.3,23 22.35,23.1 26.3,23.1 67.65,23.15 55.15,23.55 65.15,23.65 61.35,24.4 67.65,24.55 30.773,24.647 22.5,25.1 63.9,25.1 24.2,25.15 60.8,25.2 67.05,25.25 52.199,25.441 59.7,25.75 37.3,25.9 22.4,26.5 38.4,26.5 28.6,26.9 35.2,26.9 24,27.9 41.35,28.05 43.95,28.05 55,28.1 69.85,28.25 22.5,28.3 54.35,28.5 69.4,28.9 70.6,28.9 55.8,29.25 23.9,29.35 35.8,29.35 47.7,29.35 50.1,29.35 52.15,29.35 40,29.4 42.3,29.4 25.35,29.5 69,29.7 70.6,29.8 22.7,30.2 32.33,30.43 28.15,30.525 65.1,30.6 62.75,30.7 24.78,30.93 70.5,31 34.9,31.1 37.5,31.1 40,31.2 42.55,31.2 57.7,31.2 60.2,31.2 45.05,31.25 47.6,31.25 50.15,31.25 52.7,31.25 55.2,31.25 27.27,31.26 29.81,31.26 60.25,32.25 69.96,32.27 55.1,32.28 57.73,32.28 27.22,32.32 32.31,32.3 47.54,32.32 50.11,32.32 65.22,32.32 70.8,32.3 24.79,32.33 29.76,32.35 34.87,32.33 37.41,32.33 45.06,32.33 52.71,32.33 62.75,32.35 39.96,32.37 42.5,32.37
GPIO0/BOOT: C20.1 M1.F7 R43.1 SW2.1 TP2.1 | length 35.2
  Top Layer w0.15: SW2.1@42.5,18.95 43.35,18.1 R43.1@44.3,18.1 44.8,18.1 44.9,18.2 v1(44.9,18.25) ; SW2.1@42.5,19 42.5,20.95 43.097,21.547 43.472,21.547 C20.1@43.475,21.55 ; v1(63.1,25.3) 63.1,25.85 M1.F7@63.25,26
  Bottom Layer w0.15: v1(44.9,18.25) 45.2,18.55 47.9,18.55 53.684,24.334 cw(c53.843,24.175) 53.843,24.4 57.35,24.4 57.55,24.6 60.785,24.6 ccw(c60.785,24.825) 60.944,24.666 61.228,24.95 61.7,24.95 61.95,24.7 62.85,24.7 63.1,24.95 v1(63.1,25.3) 63.1,25.703 62.653,26.15 61.75,26.15 60.3,27.6 58.15,27.6 57.675,28.075 TP2.1@57.675,28.15
GPIO1/UART0-DTR: J5.11 M1.E8 R16.2 | length 37.9
  Top Layer w0.15: v1(36.2,27) 36.225,26.975 36.225,26.45 R16.2@36.25,26.425 ; M1.E8@62.15,27.1 62.675,27.625 v1(62.675,29.85)
  Layer 3 w0.15: J5.11@36.127,31.62 36.127,30.523 37.4,29.25 37.4,28.2 v1(36.2,27)
  Bottom Layer w0.15: J5.11@36.127,31.62 37.447,30.3 60.25,30.3 61.8,28.75 62.426,28.75 62.625,28.949 62.675,28.999 v1(62.675,29.85)
GPIO2/GREEN: M1.H8 R4.2 | length 14.7
  Top Layer w0.15: v1(64.8,25.2) 64.8,25.532 64.9,25.632 64.9,26.55 M1.H8@65.45,27.1 ; v1(65.8,16.3) 65.8,16.318 66.107,16.625 66.725,16.625 R4.2@66.75,16.65
  Bottom Layer w0.15: v1(64.8,25.2) 64.8,24.85 65,24.65 65.95,24.65 66.793,23.807 66.793,23.107 67.45,22.45 67.45,19.126 65.6,17.276 65.6,16.85 65.8,16.65 v1(65.8,16.3)
GPIO3: M1.J9 TP3.1 | length 3.1
  Top Layer w0.15: v1(66.3,29.8) 66.3,29.793 66.54,29.553 M1.J9@66.54,28.21
  Bottom Layer w0.25: TP3.1@66.1,31.1 66.12,31.08 66.12,30.28 66.252,30.148 66.252,29.848 v1(66.3,29.8)
GPIO4: J5.19 M1.D8 | length 32.7
  Top Layer w0.15: v1(60.3,26.4) 60.35,26.4 M1.D8@61.05,27.1
  Bottom Layer w0.15: J5.19@33.587,16.38 36.007,18.8 43.75,18.8 44.473,19.523 47.423,19.523 53.8,25.9 54.9,25.9 56.35,27.35 57.15,27.35 58.1,26.4 v1(60.3,26.4)
GPIO5/RED: M1.J8 R7.2 | length 14.6
  Top Layer w0.15: v1(65.4,15.7) 66.65,15.7 R7.2@66.75,15.8 ; v1(65.7,24.1) 66,24.4 66,26.55 M1.J8@66.55,27.1
  Bottom Layer w0.15: v1(65.4,15.7) 65.4,16.02 65.225,16.195 65.225,17.325 67.15,19.25 67.15,22.3 66.4,23.05 66.4,23.4 v1(65.7,24.1)
GPIO6/UART0-CTS: J5.12 M1.F9 R11.2 | length 55.1
  Top Layer w0.15: R11.2@34.9,22.5 35.05,22.5 35.6,21.95 35.6,21.7 v1(35.5,21.6) ; v1(63.2,29.1) 63.25,29.05 M1.F9@63.25,28.2
  Layer 3 w0.15: J5.12@33.587,31.62 33.505,31.537 32.589,31.537 31.251,30.2 29.25,30.2 26.75,27.7 26.75,25.7 27.9,24.55 29.5,24.55 33.35,20.7 34.6,20.7 v1(35.5,21.6)
  Bottom Layer w0.15: J5.12@33.587,31.62 35.207,30 60.05,30 61.65,28.4 62.5,28.4 v1(63.2,29.1)
GPIO7/UART0-DSR: J5.10 M1.E9 R15.2 | length 53
  Top Layer w0.15: v1(34.5,21.3) 34.9,21.7 R15.2@34.9,21.95 ; M1.E9@62.15,28.2 v1(62.15,29.25)
  Layer 3 w0.15: v1(34.5,21.3) 33.809,21.991 33.809,22.641 28.95,27.5 28.95,29 29.5,29.55 34.05,29.55 34.55,29.05 34.55,26.7 35,26.25 36.35,26.25 38.667,28.567 J5.10@38.667,31.62
  Bottom Layer w0.15: J5.10@38.667,31.62 39.688,30.6 60.8,30.6 v1(62.15,29.25)
GPIO8/BLUE: M1.H9 R2.2 | length 31.9
  Top Layer w0.15: M1.H9@65.45,28.2 65.8,28.55 v1(65.8,29) ; v1(66.1,17.1) 66.195,17.1 66.395,17.3 66.565,17.3 66.75,17.485 R2.2@66.75,17.5
  Layer 3 w0.15: v1(65.8,29) 65.8,28.25 65.15,27.6 56.85,27.6 56.35,27.1 56.35,25.9 56.65,25.6 58.4,25.6 59.275,24.725 61.003,24.725 61.153,24.875 61.853,24.875 62.103,24.625 65.847,24.625 66.3,24.172 66.3,22.922 65.925,22.547 65.925,19.425 66.275,19.075 66.275,17.37 66.1,17.195 v1(66.1,17.1)
GPIO9: J5.20 M1.E7 | length 30.9
  Top Layer w0.15: v1(62.1,25.3) 62.1,25.95 M1.E7@62.15,26
  Bottom Layer w0.15: J5.20@36.127,16.38 36.18,16.38 38.2,18.4 43.9,18.4 44.723,19.223 47.573,19.223 53.85,25.5 59.05,25.5 59.3,25.25 60,25.25 60.45,25.7 61.1,25.7 61.5,25.3 v1(62.1,25.3)
GPIO10: J5.26 M1.H3 | length 21.2
  Top Layer w0.15: M1.H3@65.45,21.6 v1(65.45,22.3)
  Bottom Layer w0.15: J5.26@51.367,16.38 51.367,17.167 51.8,17.6 58.465,17.6 58.665,17.8 59.304,17.8 59.579,17.525 59.585,17.525 60.768,17.525 60.855,17.612 62.038,17.612 62.125,17.525 63.175,17.525 64.325,18.675 64.325,18.897 64.603,19.175 66.049,19.175 66.55,19.676 66.55,21.2 v1(65.45,22.3)
GPIO11: J5.22 M1.G3 | length 28.7
  Top Layer w0.15: v1(64.15,22.4) 64.2,22.4 64.35,22.25 M1.G3@64.35,21.6
  Bottom Layer w0.15: J5.22@41.207,16.38 42.527,17.7 46.473,17.7 46.773,18 49.05,18 49.275,18.225 49.275,18.525 53.415,22.665 55.685,22.665 55.9,22.45 56.7,22.45 58,23.75 59.878,23.75 60.928,22.7 61.7,22.7 62,23 62.796,23 63.025,22.771 63.025,22.303 63.303,22.025 63.775,22.025 v1(64.15,22.4)
GPIO12: J5.25 M1.G2 | length 25.1
  Top Layer w0.15: M1.G2@64.35,20.5 64.9,21.05 64.9,22.45 v1(64.8,22.55)
  Bottom Layer w0.15: J5.25@48.827,16.38 48.904,16.38 49.699,17.175 50.475,17.175 51.212,17.912 58.312,17.912 58.5,18.1 59.428,18.1 59.703,17.825 60.644,17.825 60.731,17.912 62.162,17.912 62.249,17.825 63.025,17.825 64.025,18.825 64.025,19.021 64.479,19.475 65.925,19.475 66.25,19.8 66.25,20.9 65.625,21.525 65.387,21.525 64.8,22.113 v1(64.8,22.55)
GPIO13: J5.21 M1.A6 | length 22.6
  Top Layer w0.15: v1(56.9,24.9) M1.A6@57.75,24.9
  Bottom Layer w0.15: J5.21@38.667,16.38 40.387,18.1 44.05,18.1 44.873,18.923 46.847,18.923 47.823,18.923 53.8,24.9 56.805,24.9 v1(56.9,24.9)
GPIO14: J5.8 M1.A5 | length 18.3
  Top Layer w0.15: v1(56.9,23.9) 56.995,23.9 57.095,23.8 M1.A5@57.75,23.8
  Layer 3 w0.15: J5.8@43.747,31.62 43.747,31.553 48,27.3 48,25.6 49.45,24.15 55.65,24.15 55.95,23.85 56.759,23.85 ccw(c56.759,24.075) v1(56.9,23.9)
GPIO17/I2C-SDA: J5.23 M1.A3 | length 17.8
  Top Layer w0.15: v1(56.1,21.4) 56.195,21.4 56.345,21.25 57.15,21.25 57.285,21.385 57.535,21.385 M1.A3@57.75,21.6
  Bottom Layer w0.15: J5.23@43.747,16.38 44.767,17.4 46.597,17.4 46.897,17.7 49.25,17.7 49.325,17.775 49.947,17.775 53.15,20.978 53.15,21.8 53.715,22.365 55.485,22.365 56.1,21.75 v1(56.1,21.4)
GPIO18/I2C-SCL: J5.24 M1.B4 | length 17.3
  Top Layer w0.15: v1(57,21.8) 57.032,21.8 57.382,22.15 58.3,22.15 M1.B4@58.85,22.7
  Bottom Layer w0.15: J5.24@46.287,16.38 47.307,17.4 49.4,17.4 49.475,17.475 50.275,17.475 53.5,20.7 53.5,21.6 53.965,22.065 55.14,22.065 55.565,21.64 55.565,21.135 55.9,20.8 56.5,20.8 57,21.3 v1(57,21.8)
GPIO21: J5.6 M1.C8 | length 20.4
  Top Layer w0.15: v1(59.4,28.9) 59.375,28.875 59.375,27.625 59.675,27.325 59.725,27.325 59.9,27.15 M1.C8@59.9,27.1
  Layer 3 w0.15: J5.6@48.827,31.62 48.827,25.973 49.95,24.85 52.75,24.85 53.35,24.85 56.45,27.95 58.45,27.95 v1(59.4,28.9)
GPIO26: M1.E1 TP4.1 | length 8.1
  Top Layer w0.15: v1(61.9,18.7) 61.925,18.725 62.15,18.95 M1.E1@62.15,19.4
  Bottom Layer w0.15: TP4.1@58.4,22.6 59.95,22.6 60.55,22 61.75,22 62.325,21.425 62.325,19.125 v1(61.9,18.7)
GPIO27: M1.F2 TP5.1 | length 4.3
  Top Layer w0.15: v1(62.6,18.3) 62.6,18.75 62.675,18.825 62.675,19.925 M1.F2@63.25,20.5
  Bottom Layer w0.15: v1(62.6,18.3) 62.579,18.321 62.579,18.755 62.8,18.976 62.8,19.25 TP5.1@63.33,19.78
GPIO28: M1.D1 TP6.1 | length 5.8
  Top Layer w0.25: v1(60.9,18.7) 61.05,18.85 M1.D1@61.05,19.4
  Bottom Layer w0.15: TP6.1@56.45,18.65 57.2,19.4 58.05,19.4 58.65,18.8 60.3,18.8 60.4,18.7 v1(60.9,18.7)
GPIO29: M1.C4 TP7.1 | length 6.5
  Top Layer w0.15: M1.C4@59.95,22.7 60.5,23.25 60.5,23.618 60.7,23.818 v1(60.7,23.9)
  Bottom Layer w0.15: TP7.1@56.21,23.27 56.33,23.15 56.976,23.15 57.926,24.1 60.5,24.1 v1(60.7,23.9)
GPIO30: M1.F1 TP8.1 | length 15.7
  Top Layer w0.25: v1(63.2,18.7) 63.25,18.75 M1.F1@63.25,19.4
  Bottom Layer w0.15: TP8.1@54.84,21.34 54.84,21.143 55.533,20.45 56.8,20.45 57.55,21.2 57.55,22.8 58.075,23.325 59.725,23.325 60.71,22.34 61.86,22.34 64.1,20.1 64.1,19.525 63.63,19.055 63.555,19.055 63.267,18.767 v1(63.2,18.7)
GPIO31: M1.E2 TP9.1 | length 8
  Top Layer w0.15: v1(59.9,18.3) 60.278,18.678 60.278,18.75 60.5,18.972 60.5,19.768 60.707,19.975 61.625,19.975 M1.E2@62.15,20.5
  Bottom Layer w0.15: v1(59.9,18.3) 59.953,18.247 60.281,18.247 60.303,18.225 61.125,18.225 61.425,18.525 61.425,20.125 61.6,20.3 TP9.1@61.6,21.1
GPIO32: M1.D2 TP10.1 | length 3.7
  Top Layer w0.15: v1(60.3,21.5) 60.5,21.3 60.5,21.05 M1.D2@61.05,20.5
  Bottom Layer w0.15: TP10.1@59.15,19.6 60.3,20.75 v1(60.3,21.5)
GPIO33: J5.7 M1.D3 | length 22.2
  Top Layer w0.15: M1.D3@61.05,21.6 61.05,22.75 61.1,22.8 v1(61.1,23.2)
  Layer 3 w0.15: J5.7@46.287,31.62 48.35,29.557 48.35,25.75 49.6,24.5 55.846,24.5 55.921,24.425 57.225,24.425 58.45,23.2 v1(61.1,23.2)
GPIO34: J5.9 M1.B3 | length 24.5
  Top Layer w0.15: M1.B3@58.8,21.6 59.3,21.6 59.633,21.933 v1(59.7,22)
  Layer 3 w0.15: J5.9@41.207,31.62 43.977,28.85 45.9,28.85 47.7,27.05 47.7,25.35 49.25,23.8 53.15,23.8 54.25,22.7 59,22.7 v1(59.7,22)
GPIO35: J5.14 R18.2 R20.2 | length 41
  Top Layer w0.15: v1(55,19.4) 56.05,19.4 56.225,19.225 R18.2@56.225,18.983